# Altium PCB 接收机主板.PcbDoc
Units mil, origin at the board's own origin, x right, y up, seen from the top; angles counter-clockwise.
Board outline 1400 x 1065 mil, 2 copper layers (Top Layer, Bottom Layer); 28 components, 27 nets, 132 pads, 110 vias.
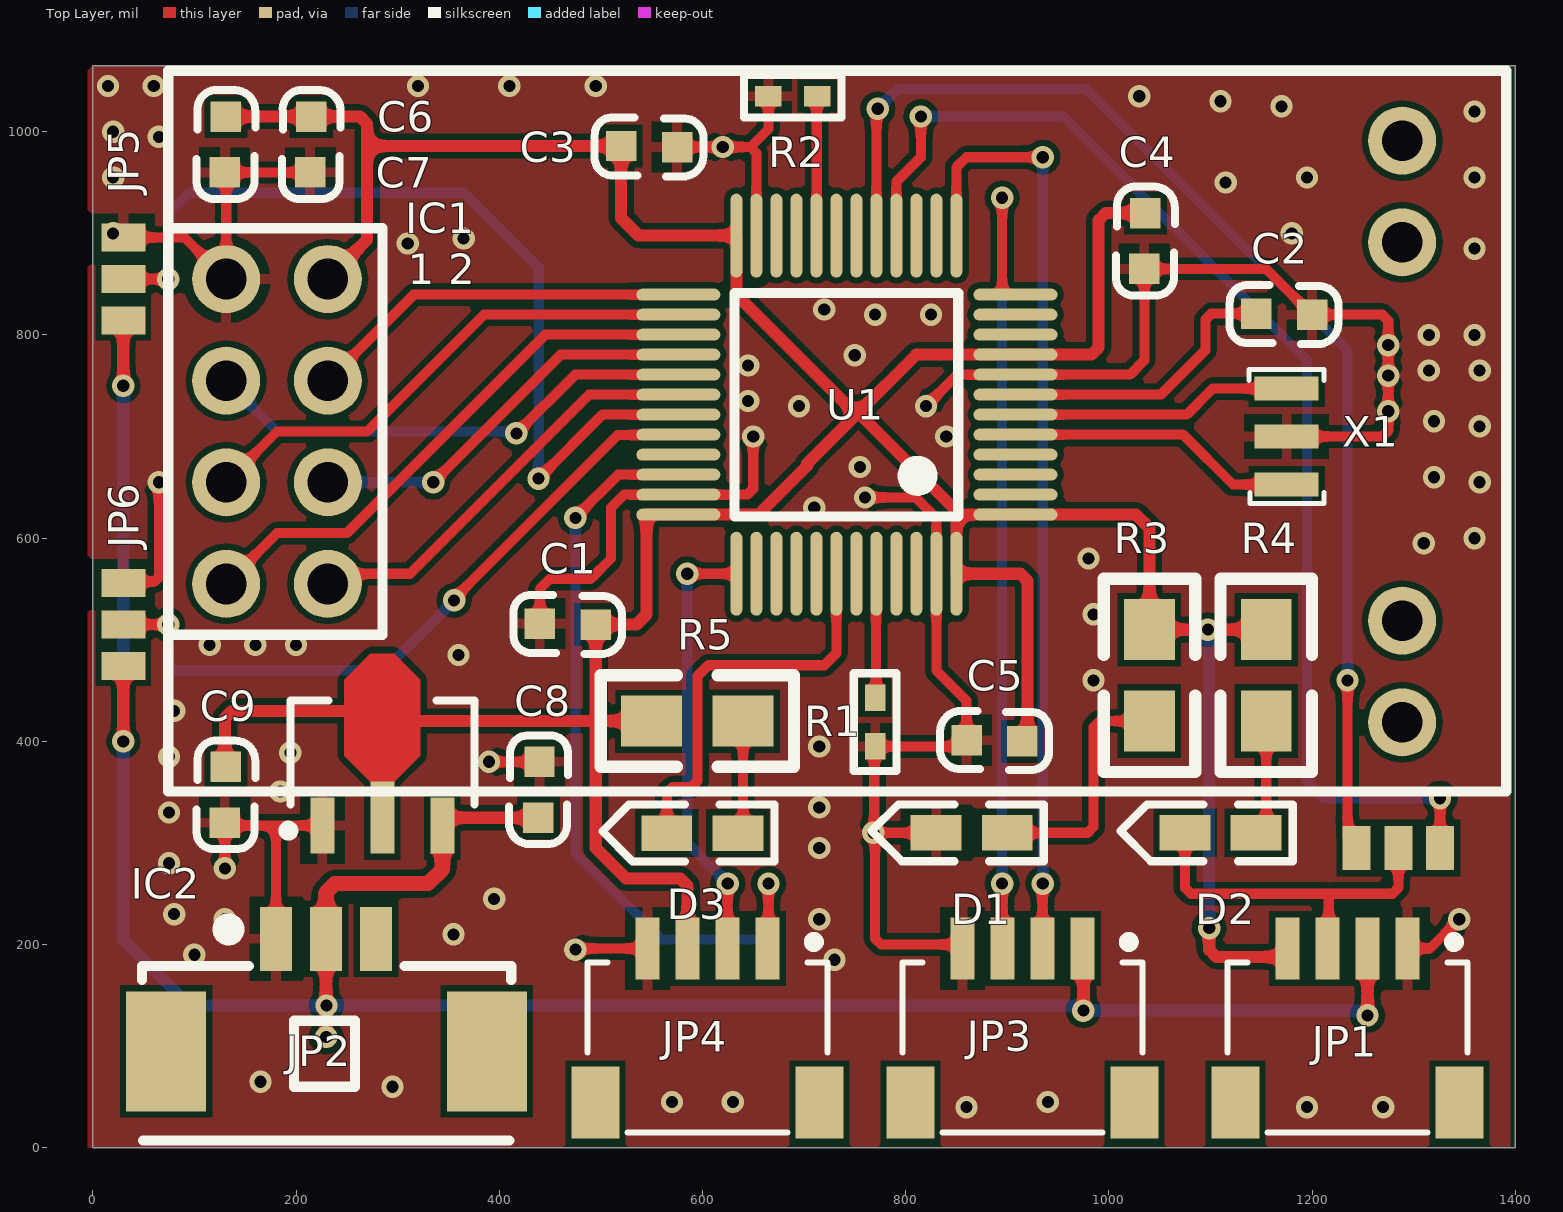
[diagram p0: Top Layer view]
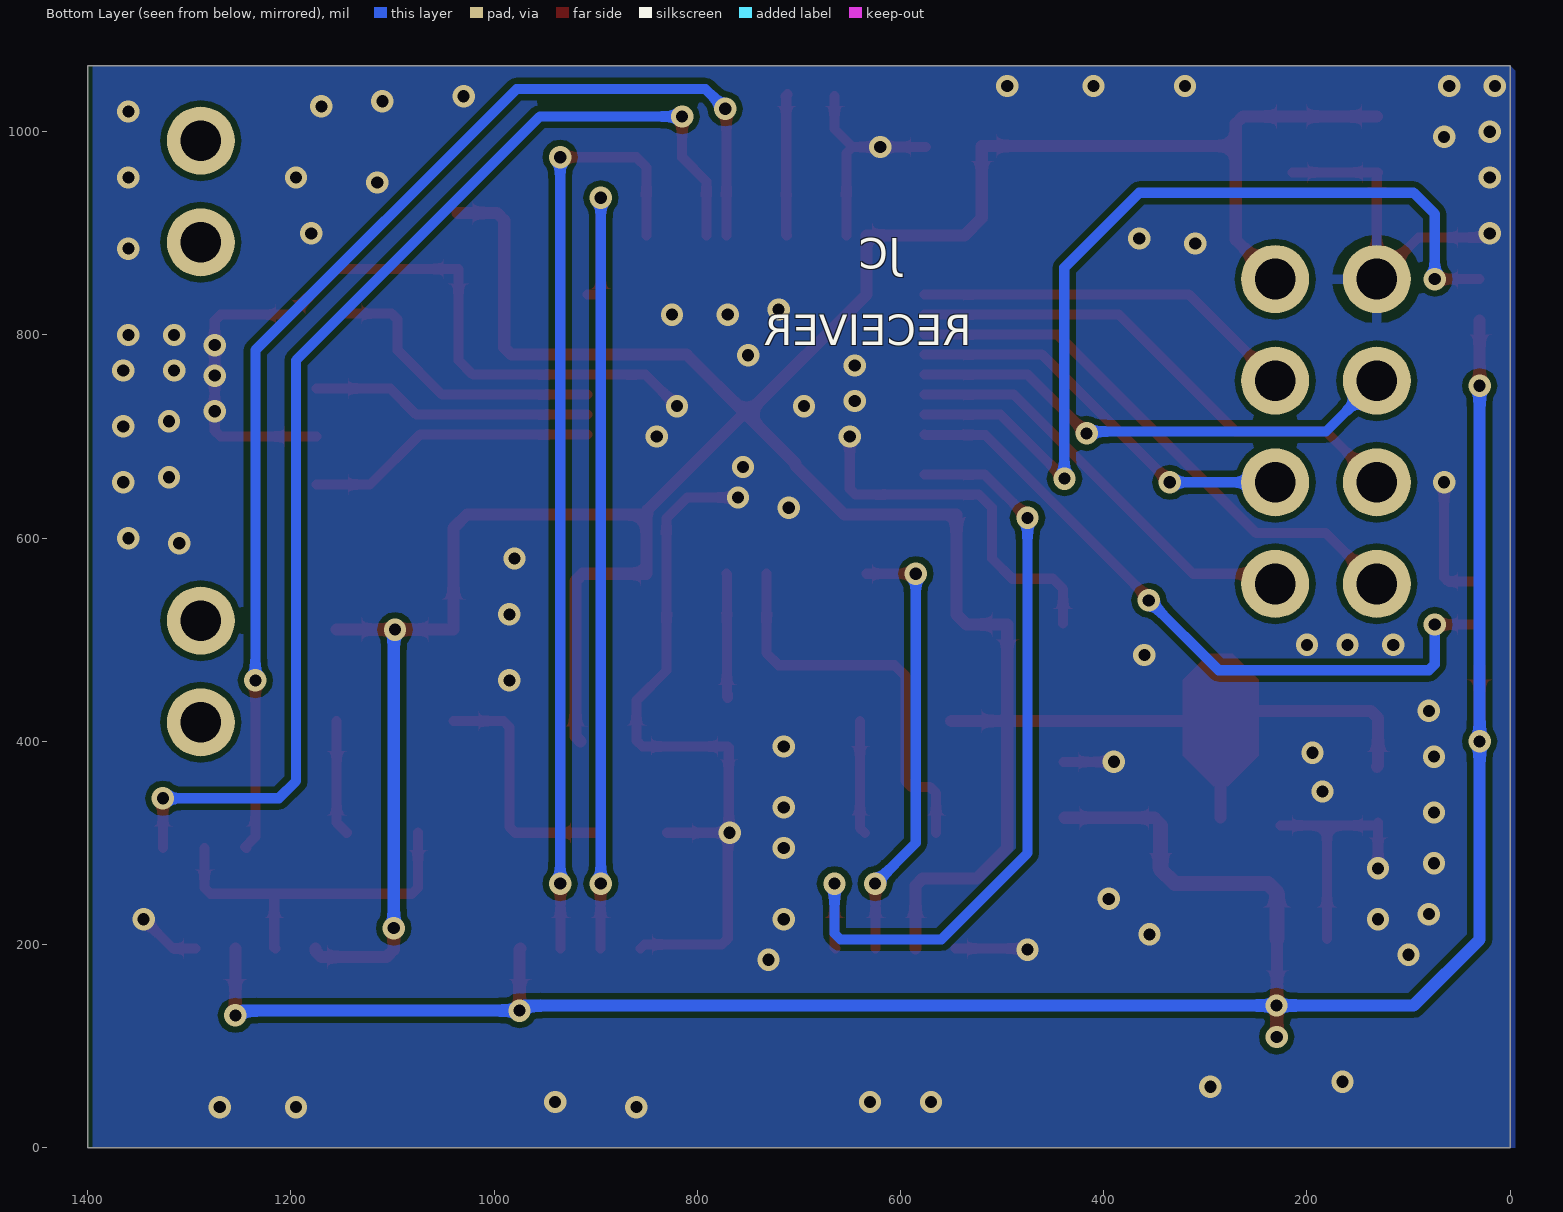
[diagram p1: Bottom Layer view, seen from below]
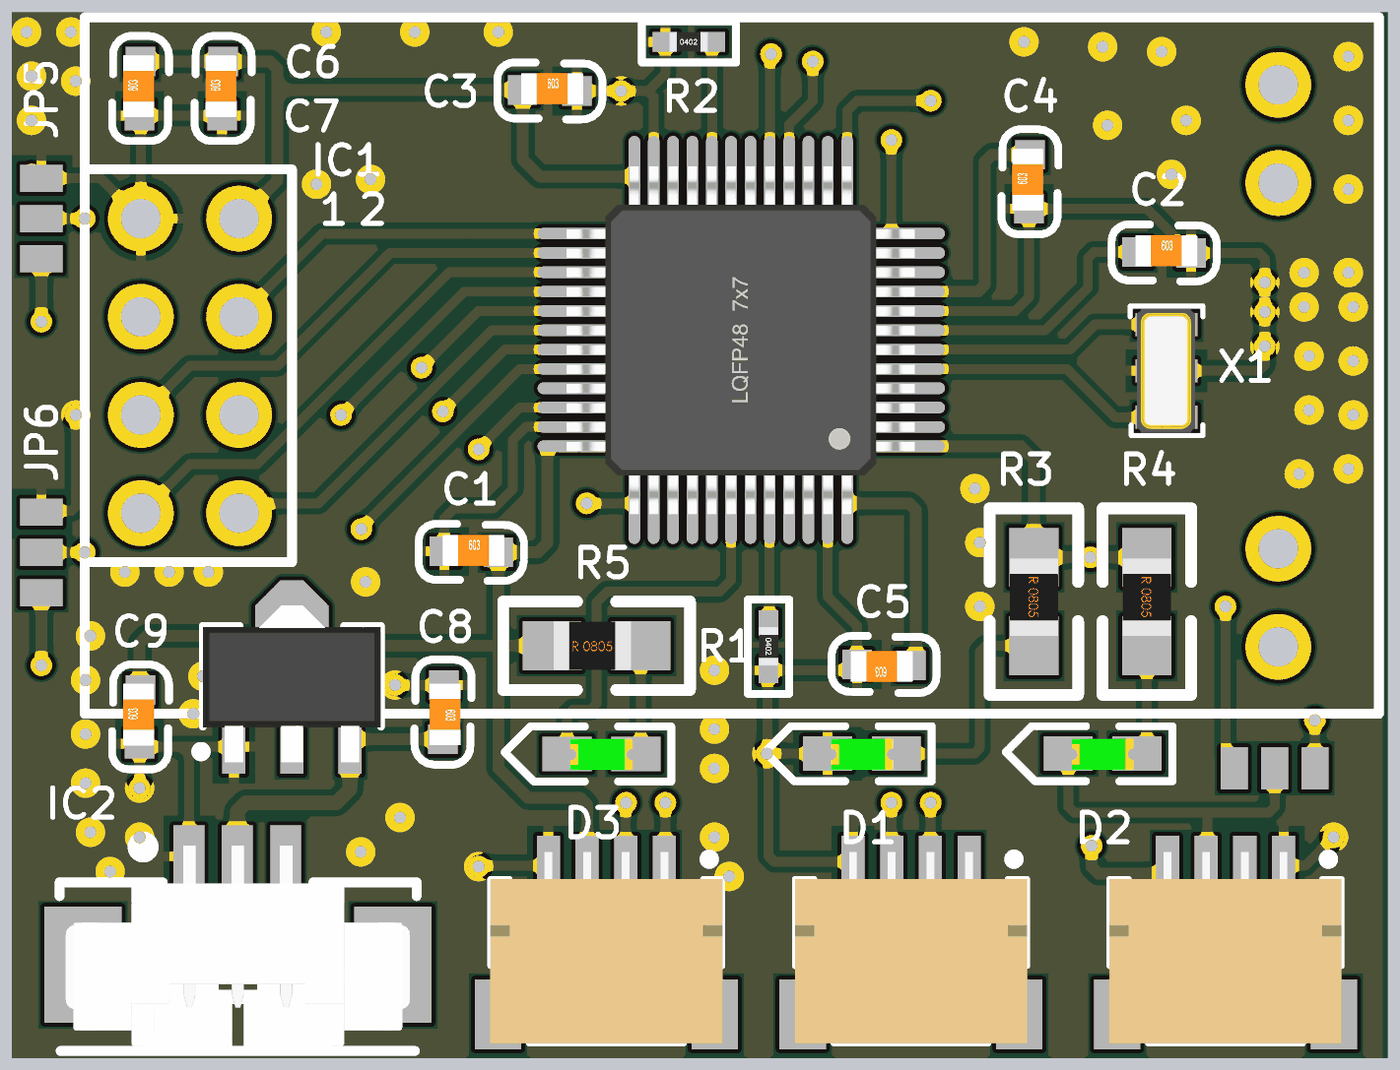
[diagram p2: 3D render of the assembled board from above, using the file's embedded part models]

## Layer stack, top to bottom
Top Solder: solder mask 0.4, Solder Resist, Dk 3.5
Top Layer: signal copper 1.4
Dielectric 1: dielectric 12.6, FR-4, Dk 4.8
Bottom Layer: signal copper 1.4
Bottom Solder: solder mask 0.4, Solder Resist, Dk 3.5

## Board outline
0,0 0,1065 1400,1065 1400,0

## Design rules (kind name [scope] priority, off if disabled: settings)
Clearance [All] p1: gap=6 ignorepadtopadclearanceinfootprint=FALSE except(8: Arc-Arc Arc-Track Track-Track)
ComponentClearance [All] p1: gap=10 collisioncheckmode=3 verticalgap=0 showdistances=TRUE
HoleToHoleClearance [All] p1: gap=2 allowstackedmicrovias=TRUE
MinimumSolderMaskSliver [All] p1: minsoldermaskwidth=5
PlaneClearance [All] p1: clearance=8
PolygonConnect [All] p1: thpad.connectstyle=Relief thpad.reliefconductorwidth=10 thpad.reliefentries=4 thpad.polygonreliefangle="90 Angle" thpad.airgapwidth=10 smdpad.connectstyle=Relief smdpad.reliefconductorwidth=10 smdpad.reliefentries=4 smdpad.polygonreliefangle="90 Angle" smdpad.airgapwidth=10 via.connectstyle=Direct via.reliefconductorwidth=10 via.reliefentries=4 via.polygonreliefangle="90 Angle" via.airgapwidth=10
RoutingVias [All] p1: holewidth=12 width=22 viastyle="Through Hole" minholewidth=12 minwidth=22 maxholewidth=12 maxwidth=22
SilkToSilkClearance [All] p1: silktosilkclearance=1
SilkToSolderMaskClearance [IsPad] p1: minsilkscreentomaskgap=1 clearancetoexposedcopper=TRUE
SolderMaskExpansion [All] p1: expansion=4 istentingtop=FALSE
Width POWER [InNetClass('POWER')] p1: maxlimit=60 minlimit=12 preferedwidth=12
Width Width_1 [All] p2: maxlimit=10 minlimit=10 preferedwidth=10
24 further rules are at their usual default settings.

## Classes and differential pairs
net class POWER: 3V3_MCU 5V
component class 接收机主板: C1 C2 C3 C4 C5 C6 C7 C8 C9 D1 D2 D3 IC1 IC2 JP1 JP2 JP3 JP4 JP6 R1 R2 R3 R4 R5 U1 X1

## Components (designator, comment, footprint, x,y, rotation, side; value= is the part's Value field where it differs from the comment)
C1 "104" 0603C 439.79,516.35 r0 top
C2 "104" 0603C 1144.79,821.35 r0 top
C3 "104" 0603C 519.79,986.35 r0 top
C4 "104" 0603C 1034.65,864.79 r90 top
C5 "104" 0603C 915.21,399.65 r180 top
C6 "104" 0603C 129.65,959.79 r90 top
C7 "22UF" 0603C 213.65,959.79 r90 top
C8 "10UF" 0603C 440,380 r270 top
C9 "22UF" 0603C 129.65,319.79 r90 top
D1 "LED" LED-0603G 900,310.26 r180 top
D2 "LED" LED-0603G 1145,310.26 r180 top
D3 "LED" LED-0603G 635,310 r180 top
IC1 "E01-ML01DP5" E01-ML01DP5 710,705 r0 top locked
IC2 "AMS1117" AMS1117 285,321.06 r90 top
JP1 "RC-OUT" "SH1.0 S-W-4P" 1235,15 r0 top
JP2 "POWER" "MX 1.25-WS-3P" 230,95 r0 top
JP3 "USART1" "SH1.0 S-W-4P" 915,15 r0 top
JP4 "SWD" "SH1.0 S-W-4P" 605,15 r0 top
JP5 "JUPER" "JUMPER 3P" 30,896 r90 top
JP6 "JUPER" "JUMPER 3P" 30,556 r90 top
JP7 "JUPER" "JUMPER 3P" 1244,295 r180 top
R1 "10K" 0402R 770,443 r270 top
R2 "10K" 0402R 665,1035 r0 top
R3 "1k" 0805R 1040,510 r270 top
R4 "1k" 0805R 1155,510 r270 top
R5 "1k" 0805R 550,420 r0 top
U1 "stm32f103c8t6_48pin" "LQFP48 7X7" 741.73,731.42 r90 top
X1 "8MHz" XTAL-3215-3P 1175,700 r90 top

## Footprints (in the part's own frame and the unit in brackets; to place one, negate y for a bottom-side part, rotate by r counter-clockwise, add the part's x,y. Pads: shape width x height; smd on the part's side, far side on the other; paste and mask are expansions set on the pad)
0402R [mil]
  rect 26x20 smd: 1(0,0) 2(48,0)
  silkscreen extent -24,-21 72,21, body extent 4,-10 43,10, height 13
0603C [mil]
  rect 30x30 smd: 1(0.21,-0.35) 2(55.21,-1.35)
  silkscreen extent -26,-30 81,28, body extent -1,-15 62,17, height 12
0805R [mil]
  rect 60x50 smd: 1(0,0) 2(90,0)
  silkscreen extent -50,-45 140,45, body extent 1,-25 80,25, height 15
AMS1117 [mm] "3V3降压芯片"
  rect 1.4x0.6 smd: 1(-0.1,1.5) 3(-0.1,-1.5)
  rect 1.8x0.6 smd: 2(0.1,0)
  Top Layer region: 0.889,0.189 1.65,0.95 3.55,0.95 4.2,0.3 4.2,-0.3 3.55,-0.95 1.65,-0.95 0.889,-0.189
  silkscreen extent -0.35,-2.3 3.02,2.47, body extent -0.5,-2.3 3.55,2.3, height 1.6
E01-ML01DP5 [mm] "2.4G模块"
  round 1.7 hole 1.02: 0(14.7,-7.27) 0(14.7,-4.73) 0(14.7,4.73) 0(14.7,7.27) 1(-14.7,3.81) 2(-12.16,3.81) 3(-14.7,1.27) 4(-12.16,1.27) 5(-14.7,-1.27) 6(-12.16,-1.27) 7(-14.7,-3.81) 8(-12.16,-3.81)
  silkscreen extent -16.15,-9 17.3,9.02
"JUMPER 3P" [mm]
  rect 0.7x1.1 smd: 1(0,0) 2(-1.041,0) 3(-2.083,0)
LED-0603G [mil]
  rect 50x35 smd: A(0,0.26) K(70,0.26)
  silkscreen extent -36,-28 134,28, body extent 4,-15 66,17, height 24
"LQFP48 7X7" [mm]
  oval 0.3x2.1 smd: 1(-2.75,-4.227) 2(-2.25,-4.227) 3(-1.75,-4.227) 4(-1.25,-4.227) 5(-0.75,-4.227) 6(-0.25,-4.227) 7(0.25,-4.227) 8(0.75,-4.227) 9(1.25,-4.227) 10(1.75,-4.227) 11(2.25,-4.227) 12(2.75,-4.227) 25(2.75,4.202) 26(2.25,4.202) 27(1.75,4.202) 28(1.25,4.202) 29(0.75,4.202) 30(0.25,4.202) 31(-0.25,4.202) 32(-0.75,4.202) 33(-1.25,4.202) 34(-1.75,4.202) 35(-2.25,4.202) 36(-2.75,4.202)
  oval 2.1x0.3 smd: 13(4.227,-2.75) 14(4.227,-2.25) 15(4.227,-1.75) 16(4.227,-1.25) 17(4.227,-0.75) 18(4.227,-0.25) 19(4.227,0.25) 20(4.227,0.75) 21(4.227,1.25) 22(4.227,1.75) 23(4.227,2.25) 24(4.227,2.75) 37(-4.227,2.75) 38(-4.227,2.25) 39(-4.227,1.75) 40(-4.227,1.25) 41(-4.227,0.75) 42(-4.227,0.25) 43(-4.227,-0.25) 44(-4.227,-0.75) 45(-4.227,-1.25) 46(-4.227,-1.75) 47(-4.227,-2.25) 48(-4.227,-2.75)
  silkscreen extent -2.79,-2.79 2.79,2.79, body extent -4.51,-4.5 4.5,4.5, height 1.45
"MX 1.25-WS-3P" [mm]
  rect 2x3 smd: 0(-4.007,0) 0(4.007,0)
  rect 0.8x1.6 smd: 1(-1.264,2.811) 2(-0.014,2.811) 3(1.236,2.811)
  silkscreen extent -4.61,-2.23 4.62,3.25, body extent -4.45,-2.1 4.45,3.09, height 3.4
"SH1.0 S-W-4P" [mm]
  rect 1.2x1.8 smd: 0(-2.8,0.75) 0(2.8,0.75)
  rect 0.6x1.55 smd: 1(1.5,4.6) 2(0.5,4.6) 3(-0.5,4.6) 4(-1.5,4.6)
  silkscreen extent -3,0 3,4.89, body extent -3,0 3,4.95, height 2.92
XTAL-3215-3P [mm]
  rect 0.6x1.6 smd: 1(-1.2,0) 2(0,0) 3(1.2,0)
  silkscreen extent -1.68,-0.94 1.68,0.94, body extent -1.6,-0.74 1.6,0.76, height 0.9

## Part data
C1 C2 C3 C4 C5: library part Cap, LatestRevisionDate=17-Jul-2002, LatestRevisionNote="Re-released for DXP Platform.", Published=8-Jun-2000, Publisher="Altium Limited"
C6 C7 C8 C9: library part CAP, "无极性电容"
IC1: "2.4G无线模块"
IC2: "3V3降压芯片"
JP1 JP3 JP4: library part "Header 4", "4P接插件", BOM名称=4P接插件, 学习资源=www.ooocke.com, 版权归属=源创客
JP2: library part "Header 3", "3P接插件", BOM名称=3P接插件, 学习资源=www.ooocke.com, 版权归属=源创客
JP5 JP6 JP7: library part "JUMPER 3P", "三点焊盘跳线"
R1 R2 R3 R4 R5: library part RES
X1: library part XTAL-3P, "3脚无源晶振", BOM名称=2脚晶振, 学习资源=www.ooocke.com, 版权归属=源创客

## Via types
v1: diameter 22, hole 12, Top Layer to Bottom Layer, 110 vias

## Nets (pads, with @x,y where several pads share a name; then routed paths per layer and width w, separated by ;. In a path a pad name is that pad's centre, name@x,y a point inside that pad or via, vN(x,y) a via of type N, cw(c..) or ccw(c..) an arc to the next point about the centre after c; other vN are vias at no path point)
3V3_MCU: C1.2 C3.1 C4.2 C5.1 C6.2 C7.2 C9.2 IC1.2 IC2.2 JP1.4 JP4.3 R3.1 R4.1 R5.1 U1.1 U1.9 U1.24 U1.36 U1.48 | length 4023.8
  Top Layer w12: C9.2 130,376 130,422.97 137.03,430 277.97,430 285,422.97 ; C6.2 C7.2 262.97,1015 270,1007.97 270,986 ; IC1.2 270,893.74 270,986 ; IC2.2 285,422.97 ; R5.1 500,420 495,425 ; JP4.3 585.31,257.97 578.28,265 525,265 495,295 495,420 ; 753.34,723.53 849.31,627.55 849.31,623.83 850,623.15 ; C5.1 920,405 920,557.97 912.97,565 U1.48 850,623.15 ; C4.2 997.03,920 990,912.97 990,787.66 982.97,780.63 U1.9 810.43,780.63 751.48,721.67 ; v1(1098.79,216.21) 1098.79,194.93 1105.82,187.9 1170.13,187.9 1175.94,193.71 JP1.4 ; R4.1 v1(1097.5,510) R3.1 1040,610 1026.85,623.15 U1.1 850,623.15 ; 270,986 C3.1 520,915 537.17,897.83 U1.24 633.46,839.68 751.48,721.67 ; 285,422.97 287.97,420 495,420 ; 495,420 495,425 ; 495,425 C1.2 535,515 545,525 545,623.06 545.09,623.15 U1.36 655.02,623.15 703.25,671.38 703.25,673.45 751.48,721.67
  Bottom Layer w12: v1(1097.5,510) 1098.75,508.75 1098.75,216.25 v1(1098.79,216.21)
5V: C8.2 IC2.3 JP1.2 JP2.2 JP3.1 JP5.3 JP6.3 | length 2474.5
  Top Layer w12: v1(30,400) JP6.3 ; v1(30,750) JP5.3 ; JP2.2 229.46,109.32 v1@230,108.78 ; IC2.3 344.06,318.98 349.87,324.79 C8.2 ; JP3.1 975,195.16 v1(975,135) ; v1(1254.68,130.32) JP1.2
  Top Layer w15: JP2.2 229.46,251.21 238.24,260 330,260 344.06,274.06 IC2.3
  Bottom Layer w12: v1(30,750) v1(30,400) 30,205 95,140 v1(230,140) 970,140 v1(975,135) 1247.29,135 1251.98,130.32 v1(1254.68,130.32)
  other v1: 229.73,109.05
GND: C1.1 C2.2 C3.2 C4.1 C5.2 C6.1 C7.1 C8.1 C9.1 D1.K IC1.1 IC2.1 JP1.1 JP2.1 JP3.4 JP4.4 JP5.1 JP6.1 R1.2 R2.1 U1.8 U1.23 U1.35 U1.47 X1.2 | length 3000.9
  Top Layer w10: JP6.1 31.26,557.26 60.8,557.26 65,561.46 v1(65,655) ; JP5.1 90.26,896 IC1.1 131.26,958.74 C6.1 C7.1 ; v1(130,275) C9.1 132.87,317.13 180.24,317.13 ; JP2.1 180.24,317.13 ; IC2.1 180.24,317.13 ; v1(390,380) 390.21,379.79 C8.1 ; C1.1 440,550 450,560 490,560 510,580 510,630 522.83,642.83 U1.35 644.14,642.83 650,648.69 v1(650,700) ; v1(475,195) 476.1,196.1 JP4.4 ; C3.2 647.29,985 ; U1.23 653.15,979.14 647.29,985 ; R2.1 665,1002.71 647.29,985 ; v1(760,640) 810,640 830.31,619.68 U1.47 830.31,469.68 860,440 C5.2 854,395 R1.2 769.13,394.13 769.13,310.87 v1(768.25,310) ; v1(820,730) 850.94,760.94 U1.8 1020.94,760.94 1035,775 C4.1 1155,865 C2.2 1269.14,820 1275,814.14 1275,705.86 1269.14,700 X1.2 ; D1.K v1(768.25,310) ; JP3.4 852.05,200 775.86,200 770,205.86 770,308.25 v1(768.25,310) ; JP1.1 1316.1,196.1 v1(1345,225)
  other v1: 860,40 1195,40 1270,40 570,45 630,45 940,45 295,60 165,65 730,185 100,190 355,210 130,225 715,225 80,230 395,245 75,280 715,295 75,330 715,335 184.61,350.67 75,385 194.45,388.88 715,395 80,430 985,460 360,485 115,495 160,495 200,495 985,525 980,580 1310,595 1360,600 710,630 1365,655 1320,660 755,670 840,700 1365,710 1320,715 1275,725 695,730 645,735 1275,760 1315,765 1365,765 645,770 750,780 1275,790 1315,800 1360,800 770,820 825,820 720,825 1360,885 310,890 365,895 20,900 1180,900 1115,950 20,955 1195,955 1360,955 620,985 65,995 20,1000 1360,1020 1170,1025 1110,1030 1030,1035 15,1045 60,1045 320,1045 410,1045 495,1045
LED1: D2.K JP1.3 JP7.2 | length 362.3
  Top Layer w10: D2.K 1075,255.86 1080.86,250 1215,250 1216.46,248.54 ; JP1.3 1216.46,197.25 1216.46,248.54 ; JP7.2 1285,255.86 1279.14,250 1217.93,250 1216.46,248.54
LED2: D3.K U1.42 | length 402
  Top Layer w10: D3.K 565,349.14 570.85,355 589.14,355 595,360.86 595,464.14 605.86,475 720,475 731.89,486.89 U1.42
MCU_RX: JP3.2 U1.13 | length 935.3
  Top Layer w10: U1.13 850,965 860,975 v1(935,975) ; JP3.2 934.68,259.68 v1(935,260)
  Bottom Layer w10: v1(935,260) v1(935,975)
MCU_TX: JP3.3 U1.12 | length 847
  Top Layer w10: v1(895,260) 895.31,259.69 JP3.3 ; v1(895,935) 895,840.52 895.84,839.68 U1.12
  Bottom Layer w10: v1(895,260) v1(895,935)
NetC2_1: C2.1 U1.7 | length 287.5
  Top Layer w10: U1.7 1051.26,741.26 1095,785 1095,815.14 1100.86,821 C2.1
NetD1_A: D1.A R3.2 | length 243.1
  Top Layer w10: D1.A 979.14,310 985,315.86 985,414.14 990.86,420 R3.2
NetD2_A: D2.A R4.2 | length 114.1
  Top Layer w10: D2.A 1155,320 R4.2
NetD3_A: D3.A R5.2 | length 112.3
  Top Layer w10: D3.A 640,314.75 R5.2
NetR1_1: R1.1 U1.44 | length 125.5
  Top Layer w10: R1.1@770,446 R1.1 770.91,443.91 770.91,564.65 U1.44
NetR2_2: R2.2 U1.20 | length 140.4
  Top Layer w10: R2.2@711.14,1036.86 R2.2 712.55,1034.55 712.55,898.87 711.86,898.18 U1.20
NRF-CE: IC1.3 U1.29 | length 490.5
  Top Layer w10: v1(416.88,703.12) 474.69,760.94 U1.29
  Bottom Layer w10: IC1.3 181.26,705 415,705 v1(416.88,703.12)
NRF-CSN: IC1.4 U1.25 | length 380.1
  Top Layer w10: IC1.4 315.94,839.68 U1.25
NRF-IRQ: IC1.8 U1.30 | length 422.2
  Top Layer w10: IC1.8 241.26,565 312.13,565 488.39,741.26 U1.30
NRF-MISO: IC1.7 U1.27 | length 546.7
  Top Layer w10: IC1.7 181.26,605 250,605 445.31,800.32 U1.27
NRF-MOSI: IC1.6 U1.28 | length 397.1
  Top Layer w10: v1(335,655) 460.63,780.63 U1.28
  Bottom Layer w10: IC1.6 v1(335,655)
NRF-SCK: IC1.5 U1.26 | length 513.4
  Top Layer w10: IC1.5 181.26,705 270,705 385,820 U1.26
OCS_IN: U1.5 X1.1 | length 287.2
  Top Layer w10: U1.5 1073.11,701.89 1122.24,652.76 X1.1
OCS_OUT: U1.6 X1.3 | length 277.5
  Top Layer w10: U1.6 1076.57,721.57 1102.24,747.24 X1.3
PPM: JP7.3 U1.16 | length 1207.7
  Top Layer w10: U1.16 790.94,950.94 815,975 v1(815,1015) ; JP7.3 v1(1326,344)
  Bottom Layer w10: v1(815,1015) 955,1015 1195,775 1195,360.86 1211.86,344 v1(1326,344)
PWM1: JP5.2 U1.31 | length 884.5
  Top Layer w10: JP5.2 v1(74.17,855) v1@75,855 ; v1(438.6,658.6) 501.57,721.57 U1.31
  Bottom Layer w10: v1(74.17,855) 74.17,919.17 95,940 365,940 438.88,866.12 438.88,658.87 v1(438.6,658.6)
PWM2: JP6.2 U1.32 | length 685.9
  Top Layer w10: JP6.2 v1(74.17,515) v1@75,515 ; v1(355.61,538.74) 355.61,540.61 516.54,701.54 575.97,701.54 U1.32
  Bottom Layer w10: v1(74.17,515) 74.17,475.86 80.03,470 286.88,470 v1(355.61,538.74)
SBUS: JP7.1 U1.17 | length 1196.8
  Top Layer w10: U1.17 771.26,1021.26 v1(772.58,1022.58) ; v1(1235,460) 1235,306 1245,296 JP7.1
  Bottom Layer w10: v1(772.58,1022.58) 792,1042 978,1042 1235,785 v1(1235,460)
SWCLK: JP4.2 U1.37 | length 434.1
  Top Layer w10: v1(585,565) U1.37 ; JP4.2 624.68,259.68 v1(625,260)
  Bottom Layer w10: v1(585,565) 585,300 v1(625,260)
SWDIO: JP4.1 U1.34 | length 790.3
  Top Layer w10: v1(475,620) 475,620.46 517.06,662.52 U1.34 ; JP4.1 665,197.05 v1(665,260)
  Bottom Layer w10: v1(475,620) 475,290 560,205 659.14,205 665,210.86 v1(665,260)
pads on no net: IC1.0 JP1.0 JP2.0 JP2.3 JP3.0 JP4.0 U1.2 U1.3 U1.4 U1.10 U1.11 U1.14 U1.15 U1.18 U1.19 U1.21 U1.22 U1.33 U1.38 U1.39 U1.40 U1.41 U1.43 U1.45 U1.46

## Polygon pours and split planes (outlines as drawn)
GND on Top Layer "GND_L01_P001" (solid, pour order 1): 0,1065 1395,1065 1395,0 -5,0 -5,1060
GND on Bottom Layer "GND_L02_P002" (solid, pour order 2): 0,1065 1395,1065 1395,0 -5,0 -5,1060

## Silkscreen, mask and mechanical layers (free items; w line width, h text height)
Bottom Overlay:
  text "JC" at 600,865 h30
  text "RECEIVER" at 530,790 h30
Mechanical 1:
  the board outline again, w10

## Text inside footprints (layer, text, board x,y; h text height)
IC1: Top Overlay "1" at 310,850 h30; Top Overlay "2" at 350,850 h30